# EAGLE board AQE_SENSORMODULE_E2V_CMOS (EAGLE 6.1)
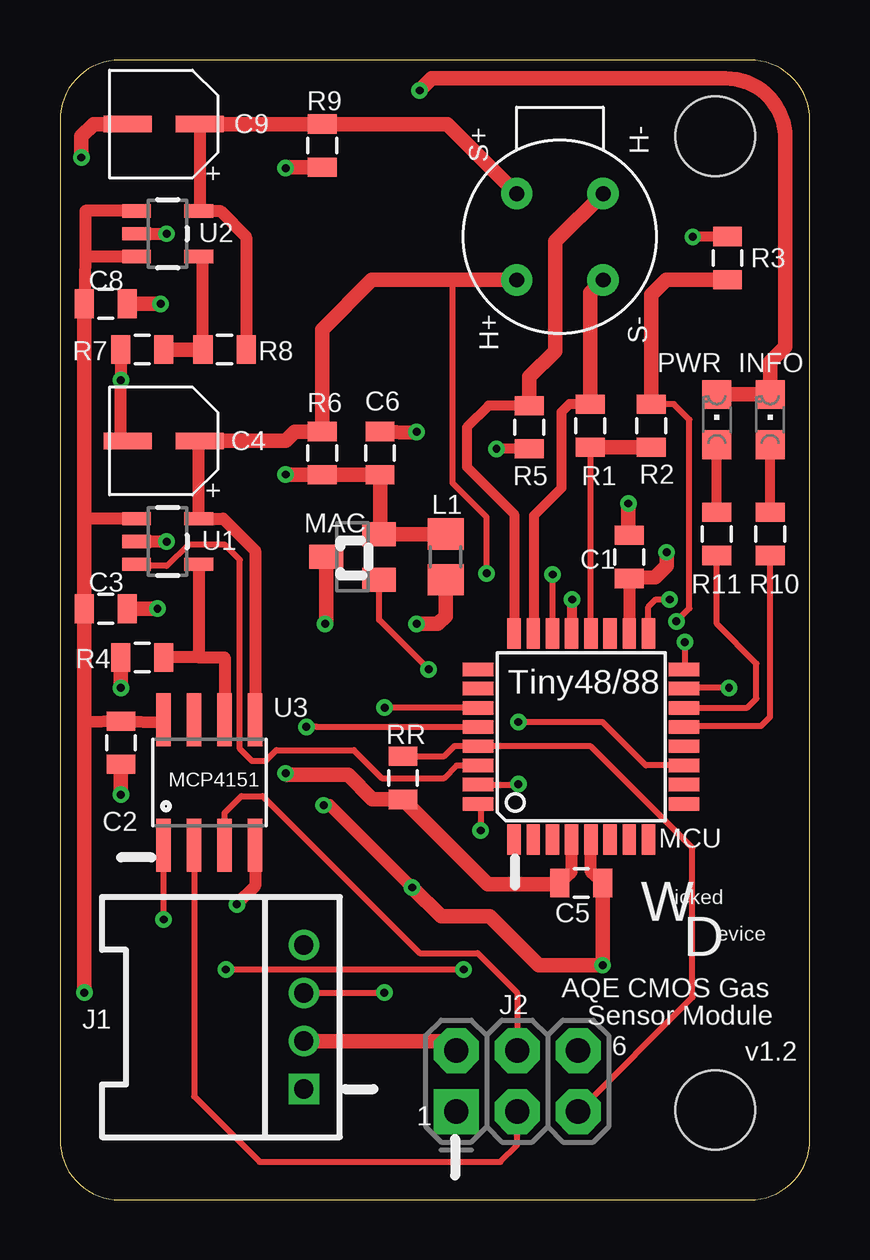
[diagram p0: board, top side]
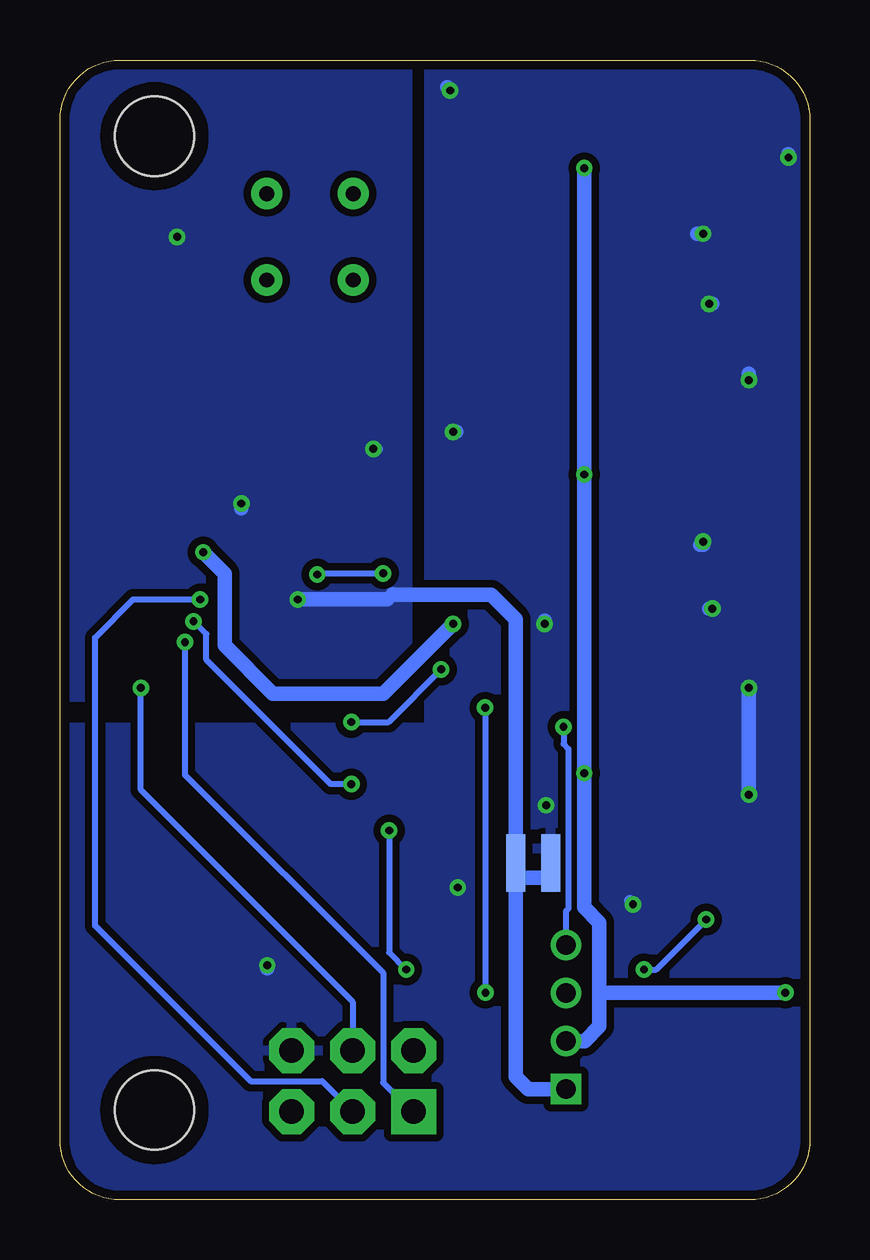
[diagram p1: board, bottom side, seen from below]

Size 31.24 x 47.5 mm. Coordinates in mm from the lower left corner, seen from the top.
Outline: 28.74,47.5 2.5,47.5 arc90 0,45 0,2.5 arc90 2.5,0 28.74,0 arc90 31.24,2.5 31.24,45 arc90 28.74,47.5
Copper layers (1*16): Top 0.0356mm / dielectric 1.5011mm / Bottom 0.0356mm
Design rules: minimum track width 6mil, minimum drill 13mil, track to track 6mil, track to pad 6mil, pad to pad 6mil, via to via 6mil, smd to smd 6mil, copper to edge 15mil, drill to drill 6mil, minimum pad ring 7mil, minimum via ring 7mil, stop-mask expansion 4mil, vias tented up to drill 0mil, thermal gap 10mil

## Footprints (pad centres in the part's own frame; a part is rotated, then mirrored left to right if it is on the bottom)
0805 = smd 0.8 x 1.2: 1 -0.9,0; 2 0.9,0
TYPE-B_ALUMINUM_CAN = smd 0.7 x 2: P$1 0,-1.5; P$2 0,1.5
SR-4 = drill 0.62 pad 1.3: FIGG/E2VS+ 1.8,1.8; FIGSIG/E2VH+ -1.8,1.8; FIGV+/E2V- 1.8,-1.8; FIGV+/E2VSIG -1.8,-1.8
CHIPLED_0805 = smd 1.2 x 1.2: A 0,-1.05; C 0,1.05
2.0_1X4_90 = drill 0.8 pad 1.27 square: 1 -3,0 | drill 0.8 pad 1.27: 2 -1,0; 3 1,0; 4 3,0
2X3-NS = drill 1.016 pad 1.88 square: 1 -2.54,-1.27 | drill 1.016 pad 1.88 octagon: 2 -2.54,1.27; 3 0,-1.27; 4 0,1.27; 5 2.54,-1.27; 6 2.54,1.27
STAND-OFF = hole 3.302: 0,0
RCL_R0805 = smd 1.3 x 1.5: 1 -0.95,0; 2 0.95,0
SOT23 = smd 1 x 1.4: 1 -0.95,-1.1; 2 0.95,-1.1; 3 0,1.1
TQFP32-08 = smd 1.27 x 0.559: 1 -4.293,2.8; 2 -4.293,2; 3 -4.293,1.2; 4 -4.293,0.4; 5 -4.293,-0.4; 6 -4.293,-1.2; 7 -4.293,-2; 8 -4.293,-2.8; 17 4.293,-2.8; 18 4.293,-2; 19 4.293,-1.2; 20 4.293,-0.4; 21 4.293,0.4; 22 4.293,1.2; 23 4.293,2; 24 4.293,2.8 | smd 0.559 x 1.27: 9 -2.8,-4.293; 10 -2,-4.293; 11 -1.2,-4.293; 12 -0.4,-4.293; 13 0.4,-4.293; 14 1.2,-4.293; 15 2,-4.293; 16 2.8,-4.293; 25 2.8,4.293; 26 2,4.293; 27 1.2,4.293; 28 0.4,4.293; 29 -0.4,4.293; 30 -1.2,4.293; 31 -2,4.293; 32 -2.8,4.293
SOT23-5 = smd 0.55 x 1.2: 1 -0.95,-1.3; 2 0,-1.3; 3 0.95,-1.3; 4 0.95,1.3; 5 -0.95,1.3
SO08 = smd 0.61 x 2.21: 1 -1.905,-2.616; 2 -0.635,-2.616; 3 0.635,-2.616; 4 1.905,-2.616; 5 1.905,2.616; 6 0.635,2.616; 7 -0.635,2.616; 8 -1.905,2.616
PLANE_COUPLER = smd 1.2 x 0.8: 1 -0.6,0; 2 0.6,0

## Placement (x,y rotation side)
C1  0.1uF  [0805]  23.72,26.8 90 top
C2  0.1uF  [0805]  2.54,19.05 270 top
C3  0.1uF  [0805]  1.91,24.64 180 top
C4  10uF  [TYPE-B_ALUMINUM_CAN]  4.32,31.62 90 top
C5  0.1uF  [0805]  21.72,13.21 0 top
C6  0.1uF  [0805]  13.34,31.11 90 top
C8  0.1uF  [0805]  1.91,37.34 180 top
C9  10uF  [TYPE-B_ALUMINUM_CAN]  4.32,44.83 90 top
GAS  E2V  [SR-4]  20.83,40.13 90 top
INFO  GREEN  [CHIPLED_0805]  29.59,32.51 0 top
J1  440055-4  [2.0_1X4_90]  10.16,7.62 90 top
J2  AVR_SPI_PRG_6NS  [2X3-NS]  19.05,4.95 0 top
JP1  STAND-OFF  [STAND-OFF]  27.3,3.75 0 top
JP2  STAND-OFF  [STAND-OFF]  27.3,44.32 0 top
L1  FERRITE  [RCL_R0805]  16.07,26.8 90 top
MAC  11AA02E48  [SOT23]  12.19,26.8 90 top
MCU  ATTINY4832A  [TQFP32-08]  21.72,19.3 90 top
PWR  RED  [CHIPLED_0805]  27.37,32.51 0 top
R1  [0805]  22.1,32.26 90 top
R2  [0805]  24.64,32.26 270 top
R3  [0805]  27.81,39.24 270 top
R4  2.4MOhm  [0805]  3.43,22.61 0 top
R5  10R  [0805]  19.56,32.19 90 top
R6  0Ohm  [0805]  10.92,31.11 90 top
R7  2.4MOhm  [0805]  3.43,35.43 0 top
R8  2.2MOhm  [0805]  6.86,35.43 0 top
R9  0Ohm  [0805]  10.92,43.93 90 top
R10  270ohm  [0805]  29.59,27.75 270 top
R11  270ohm  [0805]  27.37,27.75 270 top
RR  10 kOhm  [0805]  14.29,17.59 270 top
U1  V_REG_LDOSMD  [SOT23-5]  4.49,27.43 270 top
U2  V_REG_LDOSMD  [SOT23-5]  4.49,40.26 270 top
U3  MCP41XXX  [SO08]  6.22,17.4 0 top
U$2  PLANE_COUPLER  [PLANE_COUPLER]  12.26,14.03 270 bottom
U$3  PLANE_COUPLER  [PLANE_COUPLER]  10.79,14.03 270 bottom

## Library data of the parts
C1-C3 C5 C6 C8 = SparkFun-Passives
C4 C9 U$2 U$3 = wicked-device
GAS = ricardo
INFO PWR = adafruit
J1 = Connector
J2 JP1 JP2 R1-R11 RR U1 U2 = SparkFun
L1 = nanodeRF_11
MAC = nanode
MCU = axeio-SparkFun
U3 = SparkFun-AnalogIC

## Nets
/POT_CS: MCU.32 U3.1
/R1_SEL: MCU.20 R1.1 R2.2
/R2_SEL: MCU.31 R2.1 R3.2
/RESET: J2.5 MCU.29 RR.1
AGND: C1.2 MCU.21 R3.1 R5.1 U$2.1
AVCC: C1.1 L1.1 MCU.18
GND: C2.2 C3.1 C4.P$2 C5.2 C6.2 C8.1 C9.P$2 INFO.C J2.6 MAC.3 MCU.5 PWR.C R4.1 R7.1 U1.2 U2.2 U3.4 U$3.1
HEATER_EN: MCU.30 U1.3
HEATER_FEEDBACK: GAS.FIGV+/E2V- MCU.24 R5.2
HEATER_VCC: C4.P$1 GAS.FIGSIG/E2VH+ MCU.22 R6.2 U1.5 U3.5
MAC_IO: MAC.1 MCU.11
MISO: J2.1 MCU.16
MOSI: J2.4 MCU.15 U3.3
N$2: R7.2 R8.1 U2.4
N$3: PWR.A R11.1
N$4: INFO.A R10.1
POWER: MCU.14 R11.2
RETURN_GND: J1.1 U$2.2 U$3.2
RH-: R4.2 U1.4 U3.6
SCK: J2.3 MCU.17 U3.2
SCL: J1.4 MCU.28
SDA: J1.3 MCU.27
SENSOR: GAS.FIGV+/E2VSIG MCU.23 R1.2
SENSOR_VCC: C9.P$1 GAS.FIGG/E2VS+ R8.2 R9.2 U2.5
STATUS: MCU.13 R10.2
VCC: C2.1 C3.2 C5.1 C6.1 C8.2 J1.2 J2.2 L1.2 MAC.2 MCU.4 R6.1 R9.1 RR.2 U1.1 U2.1 U2.3 U3.8

## Tracks (layer width: path | path; a pad name or v marks a point on that pad's centre or on a via)
/POT_CS  (via drill 0.33)
  Top 0.254: MCU.32 17.53,16.5 v17.53,15.39 | v16.82,9.6 v6.91,9.6 | v4.32,11.68 U3.1
  Bottom 0.254: v6.91,9.6 6.4,9.6 v4.32,11.68 | v17.53,15.39 17.53,10.31 v16.82,9.6
/R1_SEL
  Top 0.254: MCU.20 22.12,31.34 R1.1
  Top 0.61: R1.1 R2.2
/R2_SEL  (via drill 0.33)
  Top 0.254: R2.1 25.58,33.16 26.23,32.51 26.23,24.65 v25.68,24.11 | MCU.31 19.1,17.3 v19.1,17.32
  Top 0.61: R2.1 24.64,37.72 25.26,38.34 R3.2
  Bottom 0.254: v19.1,17.32 19.96,17.32 25.15,22.5 25.15,23.57 v25.68,24.11
/RESET
  Top 0.254: J2.5 26.35,8.45 26.35,14.67 22.12,18.9 MCU.29 | RR.1 16.01,18.49 16.45,18.92 17.41,18.92
  Top 0.406: MCU.29 17.41,18.92
AGND  (via drill 0.33)
  Top 0.406: MCU.21 21.34,23.62 v21.34,25.02 | R5.1 v18.19,31.29 | R3.1 26.36,40.14 v26.36,40.13
  Top 0.61: C1.2 23.69,27.68 v23.69,29.02
  Bottom 0.406: v21.34,25.02 21.34,24.89 | v18.19,31.29 17.98,31.29
  Bottom 0.61: v23.69,29.02 23.69,28.83 | U$2.1 12.26,24.19 13.27,25.21 17.34,25.21 arc90 17.37,25.25 17.6,25.02 v21.34,25.02
  pour Bottom (isolate 0.305): 16.76,47.62 16.76,20.95 31.75,20.95 31.75,47.62
AVCC  (via drill 0.33)
  Top 0.508: C1.1 MCU.18
  Top 0.61: v25.27,26.99 25.27,26.42 24.8,25.95 C1.1 | 16.13,25.91 L1.1 16.07,24.32 15.75,24 v14.86,24
  Bottom 0.61: v25.27,26.99 24.38,26.1 24.38,23.11 22.38,21.08 17.78,21.08 v14.86,24
GND  (via drill 0.33)
  Top 0.406: MAC.3 10.92,26.8
  Top 0.508: C5.2 22.12,13.66 MCU.5 | v4.45,27.43 U1.2 | U2.2 v4.45,40.26 | C4.P$2 2.54,31.62 v2.54,34.16 R7.1 | U3.4 8.13,13.08 v7.37,12.32 | v14.67,13.02 11.24,16.45 v10.99,16.45 | 30.21,40.14 30.23,40.13
  Top 0.61: MAC.3 11.09,24.05 v11.05,24 | 2.79,44.85 C9.P$2 1.4,44.83 0.89,44.32 v0.89,43.43 | R4.1 v2.54,21.34 | C3.1 v4.06,24.64 | R7.1 | C8.1 v4.19,37.34 | C2.2 v2.54,16.89 | PWR.C INFO.C 29.59,34.92 30.23,35.56 30.23,40.13 30.23,44.24 arc90 27.73,46.74 15.49,46.74 v14.99,46.23 | v14.67,13.02 15.88,11.81 17.91,11.81 19.94,9.78 v22.61,9.78 22.61,13.17 C5.2 | C6.2 14.82,31.96 v14.86,32
  Bottom 0.508: v7.37,12.32 7.49,12.45
  Bottom 0.61: v11.05,24 11.05,24.13 | v4.45,27.43 4.45,27.3 4.57,27.3 | v4.45,40.26 4.7,40.26 | v0.89,43.43 0.89,43.56 | v2.54,21.34 v2.54,16.89 | v4.06,24.64 4.19,24.64 | v2.54,34.16 2.54,34.42 | v4.19,37.34 4.06,37.34 | 22.61,9.65 v22.61,9.78 | v14.99,46.23 15.11,46.35 | v14.86,32 14.73,32
  pour Bottom (isolate 0.305): -0.25,47.75 15.88,47.75 15.88,19.68 31.75,19.68 31.75,-0.25 -0.25,-0.25
HEATER_EN
  Top 0.254: U1.3 3.25,26.42 4.45,26.42 5.33,27.3 6.86,27.3 7.49,26.67 7.49,18.8 8,18.29 8.56,18.29 9.02,18.75 12.24,18.75 13.41,17.58 16,17.58 16.53,18.1 MCU.30
HEATER_FEEDBACK
  Top 0.406: R5.2 17.86,33.09 16.95,32.19 16.95,30.54 18.92,28.57 MCU.24
  Top 0.61: 22.62,41.93 GAS.FIGV+/E2V- 20.64,39.94 20.64,35.37 19.56,34.29 R5.2
HEATER_VCC  (via drill 0.33)
  Top 0.254: MCU.22 v20.52,26.06 | v17.78,26.11 17.78,28.45 16.36,29.87 16.36,38.33
  Top 0.508: C4.P$1 5.79,31.59 U1.5 6.8,28.38 8.13,27.05 U3.5
  Top 0.61: C4.P$1 9.4,31.62 9.78,32 10.91,32 R6.2 10.92,36.26 12.99,38.33 16.36,38.33 GAS.FIGSIG/E2VH+
  Bottom 0.254: v20.52,26.06 20.47,26.11 v17.78,26.11
MAC_IO  (via drill 0.33)
  Top 0.254: v15.36,22.1 13.29,24.17 MAC.1 | MCU.11 24.42,18.1 22.61,19.91 v19.1,19.91
  Top 0.406: MAC.1
  Bottom 0.254: v19.1,19.91 17.55,19.91 v15.36,22.1
MISO  (via drill 0.33)
  Top 0.254: v26.04,23.24 26.04,22.13 MCU.16
  Top 0.406: MCU.16
  Bottom 0.254: v26.04,23.24 26.04,17.72 17.78,9.46 17.78,4.89 16.57,3.68 J2.1
MOSI  (via drill 0.33)
  Top 0.254: v27.88,21.34 26.04,21.34 | U3.3 6.86,16.13 7.56,16.83 8.45,16.83 14.99,10.29 17.4,10.29 19.05,8.64 J2.4
  Top 0.406: 26.04,21.34 MCU.15
  Bottom 0.254: J2.4 19.05,8.26 27.88,17.08 v27.88,21.34
N$2
  Top 0.508: R8.1 5.96,39.14 U2.4
  Top 0.61: R7.2 R8.1
N$3
  Top 0.406: R11.1 PWR.A
N$4
  Top 0.406: R10.1 INFO.A
POWER
  Top 0.254: MCU.14 28.64,20.51 29.02,20.89 29.02,22.35 27.37,24 R11.2
RETURN_GND
  Bottom 0.61: U$3.2 U$2.2 12.26,5.14 11.73,4.62 J1.1
RH-
  Top 0.406: 4.29,22.61 R4.2
  Top 0.508: U1.4 5.79,22.61 | 5.79,22.61 R4.2 | 5.79,22.61 6.86,22.61 U3.6
  Top 0.61: 4.32,22.62 R4.2
SCK  (via drill 0.33)
  Top 0.254: MCU.17 24.52,24.71 24.83,25.02 v25.4,25.02 | U3.2 5.59,4.32 8.32,1.59 18.35,1.59 19.05,2.29 J2.3
  Bottom 0.254: J2.3 20.32,4.95 23.3,4.95 29.78,11.43 29.78,23.43 28.19,25.02 v25.4,25.02
SCL  (via drill 0.33)
  Top 0.254: MCU.28 10.72,19.7 10.71,19.71 v10.26,19.71
  Bottom 0.254: J1.4 10.16,12.04 10.06,12.14 10.06,18.8 10.26,19 v10.26,19.71
SDA  (via drill 0.33)
  Top 0.254: MCU.27 v13.53,20.5 | v13.51,8.64 13.51,8.62 J1.3
  Top 0.406: v13.53,20.5 v13.53,20.51
  Bottom 0.254: v13.53,20.51 13.53,8.64 v13.51,8.64
SENSOR
  Top 0.406: R1.2 21.22,33.16 20.89,32.83 20.89,29.65 19.75,28.51 19.75,23.63 MCU.23
  Top 0.61: R1.2 22.1,37.8 GAS.FIGV+/E2VSIG
SENSOR_VCC
  Top 0.508: C9.P$1 5.82,41.24 U2.5 6.67,41.21 7.76,40.12 R8.2
  Top 0.61: C9.P$1 R9.2 16.13,44.83 GAS.FIGG/E2VS+ | 7.75,35.44 R8.2
STATUS
  Top 0.254: MCU.13 26.05,19.75 29.21,19.75 29.59,20.13 R10.2
VCC  (via drill 0.33)
  Top 0.406: R6.1 10.97,30.27 | C6.1 13.29,30.22
  Top 0.508: C5.1 21.32,13.66 MCU.4 | U1.1 1.08,28.38 1.02,28.32 | U2.1 1.05,41.21 1.05,39.31 | U3.8 4.32,19.9 C2.1 1.02,19.9 1.02,20.07 | C8.2 1.05,39.31 | U2.3 1.05,39.31
  Top 0.61: MAC.2 13.34,27.75 | 13.34,27.75 C6.1 R6.1 10.91,30.23 v9.4,30.23 | C3.2 1.02,24.64 | 1.02,24.64 1.02,28.32 1.02,37.3 C8.2 1.02,37.38 | U3.8 4.32,19.94 | C5.1 20.87,13.14 17.83,13.14 RR.2 14.29,16.7 13.02,16.7 12,17.72 9.46,17.72 v9.4,17.78 | 1.02,8.62 v1.02,8.64 1.02,20.07 1.02,24.64 | R9.1 9.44,43.03 v9.4,42.99 | 13.34,27.75 L1.2 | J2.2 16.11,6.62 J1.2
  Bottom 0.61: 8.76,8.64 v1.02,8.64 | 8.76,8.64 8.76,11.56 9.4,12.19 v9.4,17.78 v9.4,30.23 v9.4,42.99 | J1.2 9.38,6.62 8.76,7.24 8.76,8.64

## Text on the board
tPlace: C9 | C4 | Tiny48/88 | MCP4151 | W | icked | evice | D | AQE CMOS Gas | Sensor Module | 6 | v1.2 | 1